# Altium PCB DEV BOARD PCB.PcbDoc
Units mm, origin at the board's own origin, x right, y up, seen from the top; angles counter-clockwise.
Board outline 99 x 99 mm, 2 copper layers (Top Layer, Bottom Layer); 53 components, 85 nets, 292 pads, 52 vias.
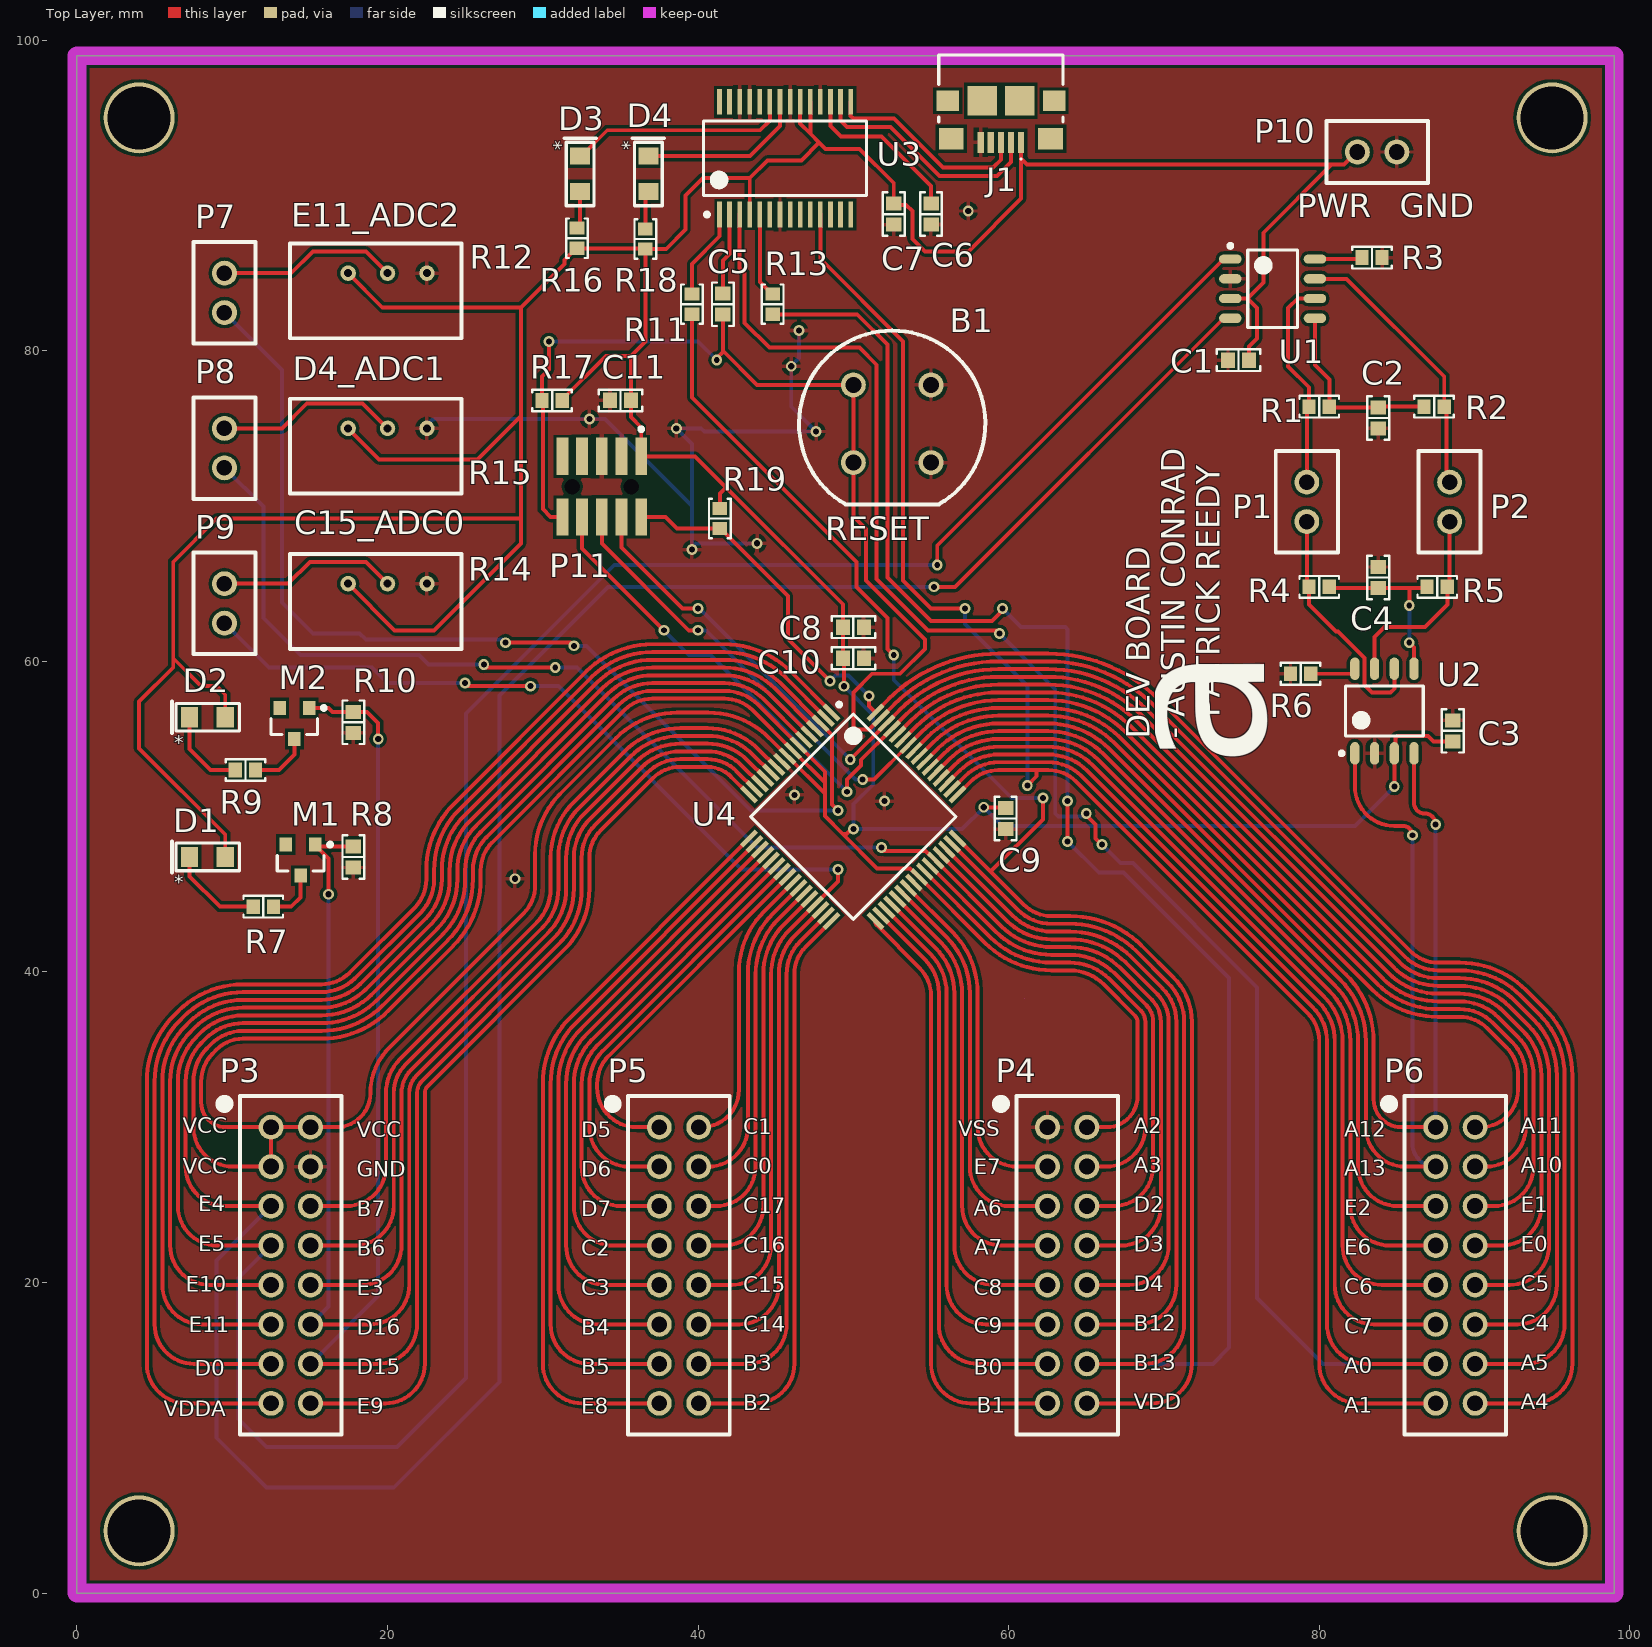
[diagram p0: Top Layer view]
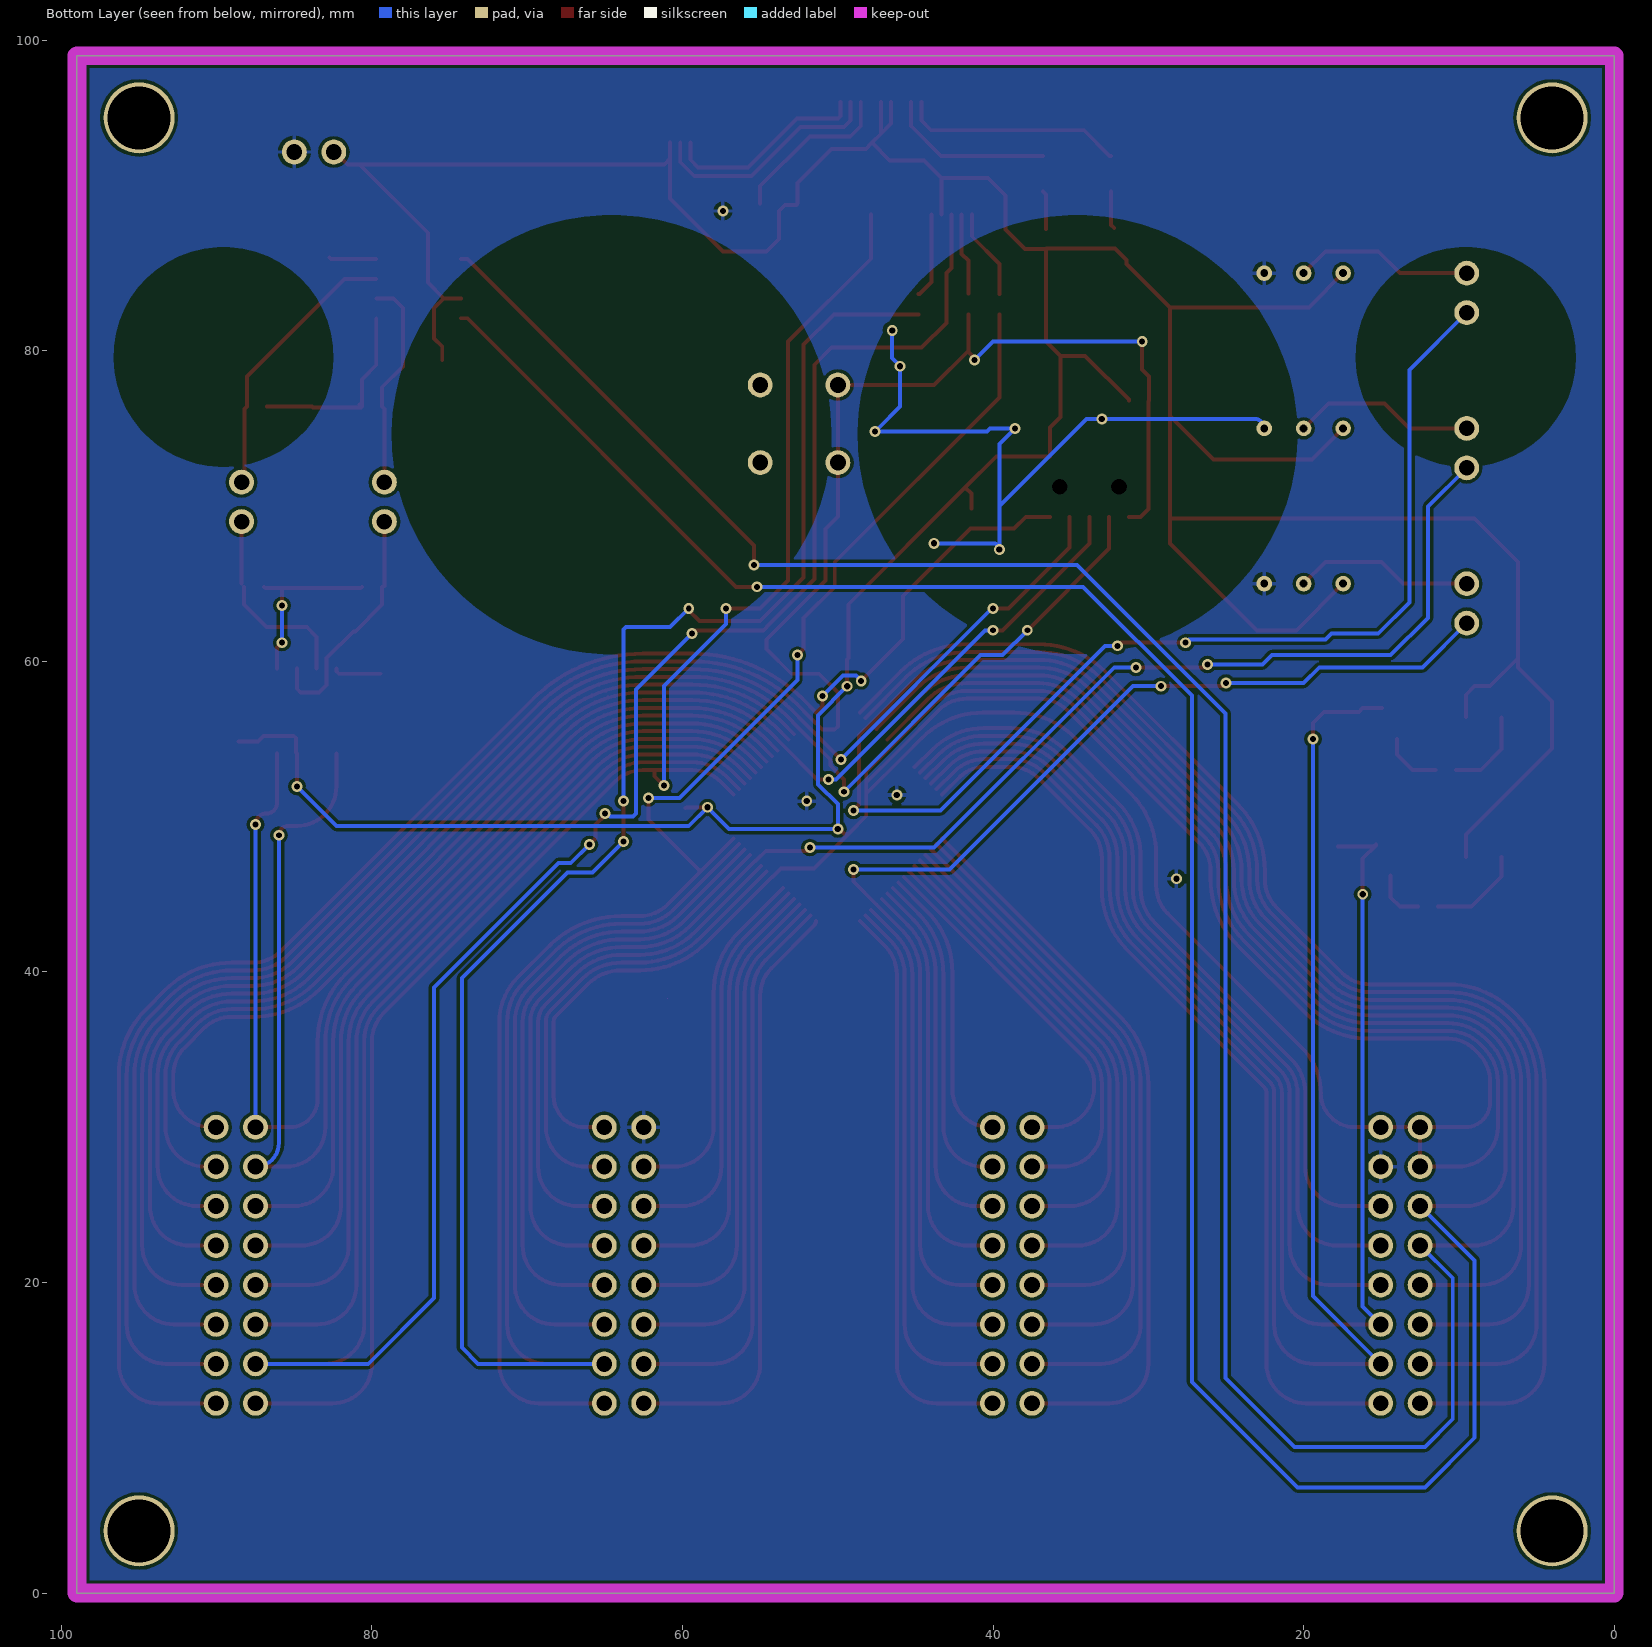
[diagram p1: Bottom Layer view, seen from below]
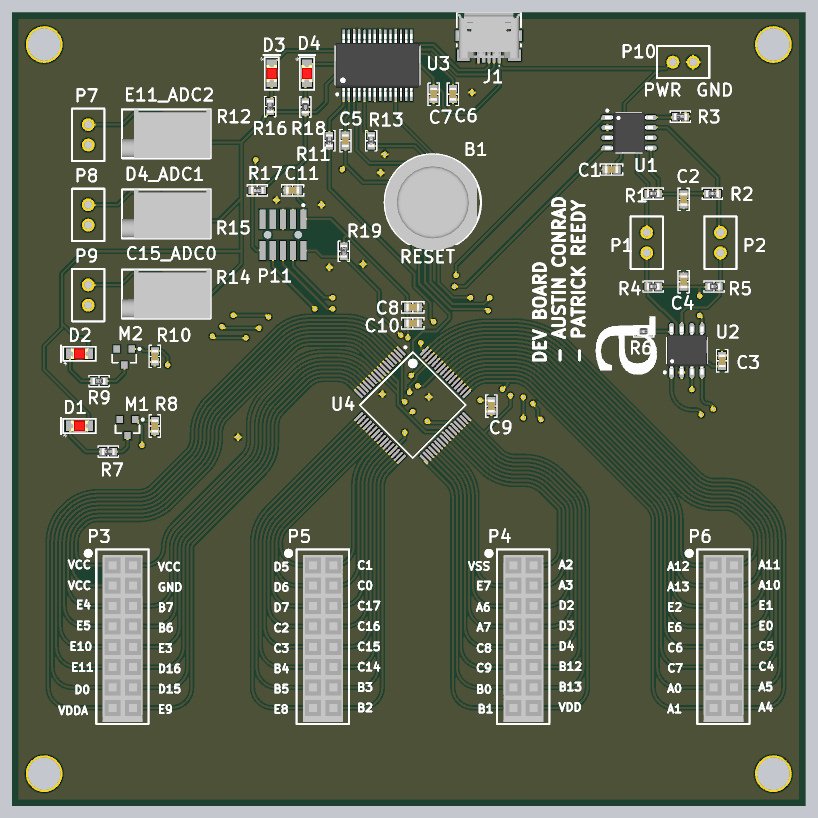
[diagram p2: 3D render of the assembled board from above, using the file's embedded part models]

## Layer stack, top to bottom
Top Solder: solder mask 0.0102, Solder Resist, Dk 3.5
Top Layer: signal copper 0.0356
Dielectric 1: dielectric 0.32, FR-4, Dk 4.8
Bottom Layer: signal copper 0.0356
Bottom Solder: solder mask 0.0102, Solder Resist, Dk 3.5

## Board outline
0,0 0,99 99,99 99,0
cut-out: -11.112,174.467
cut-out: 61,38.309

## Design rules (kind name [scope] priority, off if disabled: settings)
Clearance [All] p1: gap=0.203 ignorepadtopadclearanceinfootprint=FALSE except(0.2: Arc-SMDPad Track-SMDPad SMDPad-SMDPad SMDPad-THPad SMDPad-Via SMDPad-Fill SMDPad-Poly SMDPad-Region SMDPad-Text SMDPad-Hole)
MinimumSolderMaskSliver [All] p1: minsoldermaskwidth=0.2
PolygonConnect [All] p1: connectstyle=Relief reliefconductorwidth=0.254 reliefentries=4 polygonreliefangle="90 Angle" airgapwidth=0.254
RoutingVias [All] p1: holewidth=0.381 width=0.762 viastyle="Through Hole" minholewidth=0.381 minwidth=0.381 maxholewidth=0.762 maxwidth=1.27
SilkToSilkClearance [All] p1: silktosilkclearance=0.05
SilkToSolderMaskClearance [IsPad] p1: minsilkscreentomaskgap=0.05 clearancetoexposedcopper=TRUE
SolderMaskExpansion [All] p1: expansion=0.102
Width [All] p1: maxlimit=1.524 minlimit=0.254 preferedwidth=0.254 minimp=50.000000 maximp=50.000000 favimp=50.000000 checkconnectedcopper=TRUE
27 further rules are at their usual default settings.

## Classes and differential pairs
component class U_MCU_MKE185F512VLH16: B1 C5 C6 C7 C8 C9 C10 C11 D3 D4 J1 P7 P8 P9 P10 P11 R11 R12 R13 R14 R15 R16 R17 R18 R19 U3 U4
component class "U_Header Pinout": P3 P4 P5 P6
component class U_CAN_Tranceiver: C1 C2 C3 C4 P1 P2 R1 R2 R3 R4 R5 R6 U1 U2
component class "DEV Board": D1 D2 M1 M2 R7 R8 R9 R10

## Components (designator, comment, footprint, x,y, rotation, side; value= is the part's Value field where it differs from the comment)
B1 "KS-01Q-01" KS-01Q-01 50,72.8 r0 top value=NULL
C1 "Capacitor MLCC 0.10uf 50V CAP 0603/1608" "CAP 0603/1608" 74.8,79.4 r0 top value=0.10uf
C2 "Capacitor MLCC 4700pf 50V CAP 0603/1608" "CAP 0603/1608" 83.8,75.675 r90 top value=4700pf
C3 "Capacitor MLCC 0.10uf 50V CAP 0603/1608" "CAP 0603/1608" 88.6,55.525 r270 top value=0.10uf
C4 "Capacitor MLCC 4700pf 50V CAP 0603/1608" "CAP 0603/1608" 83.8,65.4 r270 top value=4700pf
C5 "Capacitor MLCC 0.10uf 25V CAP 0603/1608" "CAP 0603/1608" 41.6,83 r270 top value=0.10uf
C6 "Capacitor MLCC 0.10uf 25V CAP 0603/1608" "CAP 0603/1608" 55,88.8 r90 top value=0.10uf
C7 "Capacitor MLCC 0.10uf 25V CAP 0603/1608" "CAP 0603/1608" 52.6,88.8 r90 top value=0.10uf
C8 "Capacitor MLCC 0.10uf 25V CAP 0603/1608" "CAP 0603/1608" 50,62.2 r180 top value=0.10uf
C9 "Capacitor MLCC 100pf 25V CAP 0603/1608" "CAP 0603/1608" 59.8,49.875 r90 top value=100pf
C10 "Capacitor MLCC 0.10uf 25V CAP 0603/1608" "CAP 0603/1608" 50,60.2 r180 top value=0.10uf
C11 "Capacitor MLCC 0.10uf 16V CAP 0603/1608" "CAP 0603/1608" 35,76.8 r0 top value=0.10uf
D1 "LED" 0805_LED 8.4,47.4 r180 top value=Red
D2 "LED" 0805_LED 8.4,56.4 r180 top value=Red
D3 "LED" 0805_LED 32.4,91.4 r90 top value=Green
D4 "LED" 0805_LED 36.8,91.4 r90 top value=Red
J1 "1981568-1" TECO-1981568-5_V 59.5,93.425 r180 top value=CONN
M1 "DMG2302UK-7" SOT23-3 14.4,47.2 r270 top value=N_Channel
M2 "DMG2302UK-7" SOT23-3 14,56 r270 top value=N_Channel
P1 "M20-9990246" M20-9990246 79.2,69 r270 top value=CONN
P2 "M20-9990246" M20-9990246 88.4,69 r270 top value=CONN
P3 "PPTC082LFBN-RC" PPTC082LFBN-RC 12.5,30 r270 top value=CONN
P4 "PPTC082LFBN-RC" PPTC082LFBN-RC 62.5,30 r270 top value=CONN
P5 "PPTC082LFBN-RC" PPTC082LFBN-RC 37.5,30 r270 top value=CONN
P6 "PPTC082LFBN-RC" PPTC082LFBN-RC 87.5,30 r270 top value=CONN
P7 "M20-9990246" M20-9990246 9.5,85 r90 top value=CONN
P8 "M20-9990246" M20-9990246 9.5,75 r90 top value=CONN
P9 "M20-9990246" M20-9990246 9.5,65 r90 top value=CONN
P10 "M20-9990246" M20-9990246 85,92.8 r0 top value=CONN
P11 "5103309-1" HDR2X5_SMT 33.8,71.25 r180 top value=CONN
R1 "Resistor 62 0603 1/10W 5%" "RES 0603/1608" 80,76.4 r0 top value=62
R2 "Resistor 62 0603 1/10W 5%" "RES 0603/1608" 87.4,76.4 r0 top value=62
R3 "Resistor 100 0603 1/10W 10%" "RES 0603/1608" 83.4,86 r180 top value=100
R4 "Resistor 62 0603 1/10W 5%" "RES 0603/1608" 80,64.8 r0 top value=62
R5 "Resistor 62 0603 1/10W 5%" "RES 0603/1608" 87.6,64.8 r0 top value=62
R6 "Resistor 100 0603 1/10W 10%" "RES 0603/1608" 78.8,59.2 r0 top value=100
R7 "1" "RES 0603/1608" 12,44.2 r180 top
R8 "resistor" 0603 17.8,47.4 r90 top
R9 "1" "RES 0603/1608" 10.85,53 r180 top
R10 "resistor" 0603 17.8,56.075 r90 top
R11 "1k" "RES 0603/1608" 39.6,83 r270 top
R12 "3299X-1-502LF" 3299X-1-502LF 20,85 r270 top value=5K
R13 "1k" "RES 0603/1608" 44.8,83 r270 top
R14 "3299X-1-502LF" 3299X-1-502LF 20,65 r270 top value=5K
R15 "3299X-1-502LF" 3299X-1-502LF 20,75 r270 top value=5K
R16 "1k" "RES 0603/1608" 32.2,87.25 r270 top
R17 "Resistor 10k 0603 1/10W 5%" "RES 0603/1608" 30.6,76.8 r0 top value=10k
R18 "1k" "RES 0603/1608" 36.6,87.2 r270 top
R19 "Resistor 10k 0603 1/10W 1%" "RES 0603/1608" 41.4,69.2 r90 top value=10k
U1 "MCP2561 CAN Transceiver" SOIC-8 77,84 r0 top value=CAN/UART
U2 "MCP2561 CAN Transceiver" SOIC-8 84.2,56.8 r90 top value=CAN/UART
U3 "FT232RL" SSOP-28 45.6,92.4 r90 top
U4 "MKE18F512 VLH16 MCU" TQFP64 50,50 r315 top

## Footprints (in the part's own frame and the unit in brackets; to place one, negate y for a bottom-side part, rotate by r counter-clockwise, add the part's x,y. Pads: shape width x height; smd on the part's side, far side on the other; paste and mask are expansions set on the pad)
0603 [mm]
  rect 0.9x1 smd: 1(-0.675,0) 2(0.675,0)
  silkscreen extent -1.4,-0.7 1.4,0.7, body extent -0.8,-0.41 0.8,0.41, height 0.82
0805_LED [mm]
  rect 1.1x1.3 smd: 1(-1.15,0) 2(1.15,0)
  silkscreen extent -2.06,-1.02 2.29,1.02, body extent -1.05,-0.67 1.05,0.68, height 0.9
3299X-1-502LF [mm]
  round 1 hole 0.51: 1(0,-2.54) 2(0,0) 3(0,2.54)
  silkscreen extent -1.91,-6.29 4.19,4.76, body extent -1.91,-6.29 4.19,4.76, height 10.05
"CAP 0603/1608" [mm] "Chip Capacitor, 2-Leads, Body 1.60x0.80mm, IPC Medium Density"
  rect 0.9x1 smd: 1(-0.675,0) 2(0.675,0)
  silkscreen extent -1.4,-0.7 1.4,0.7, body extent -0.8,-0.41 0.8,0.41, height 0.82
HDR2X5_SMT [mm] "Header, 10-Leads, Body 3.43x6.35mm, Pitch 1.27mm"
  rect 0.76x2.4 smd: 1(-2.54,-1.95) 2(-2.54,1.95) 3(-1.27,-1.95) 4(-1.27,1.95) 5(0,-1.95) 6(0,1.95) 7(1.27,-1.95) 8(1.27,1.95) 9(2.54,-1.95) 10(2.54,1.95)
  round 0 hole 1 unplated: MH1(-1.905,0) MH2(1.905,0)
  silkscreen extent -2.67,-3.82 -2.42,-3.58, body extent -3.18,-1.72 3.18,1.72, height 4.55
KS-01Q-01 [mm]
  round 1.6 hole 1.02: 1(0,0) 2(5,0) 3(0,5) 4(5,5)
  silkscreen extent -3.5,-2.7 8.5,8.5, body extent -3.5,-3.5 8,8.5, height 14.36
M20-9990246 [mm]
  round 1.6 hole 1: 1(-2.54,0) 2(0,0)
  silkscreen extent -4.54,-2 2,2
PPTC082LFBN-RC [mm] "2x8 header female"
  round 1.6 hole 1.02: 1(0,0) 2(2.54,0) 3(5.08,0) 4(7.62,0) 5(10.16,0) 6(12.7,0) 7(15.24,0) 8(17.78,0) 9(17.78,2.54) 10(15.24,2.54) 11(12.7,2.54) 12(10.16,2.54) 13(7.62,2.54) 14(5.08,2.54) 15(2.54,2.54) 16(0,2.54)
  silkscreen extent -2,-3.07 19.78,4.54, body extent -1.3,-1.2 19.52,3.8, height 8.5
"RES 0603/1608" [mm] "Chip Resistor, 2-Leads, Body 1.60x0.80mm, IPC Medium Density"
  rect 0.85x0.95 smd: 1(-0.65,0) 2(0.65,0)
  silkscreen extent -1.27,-0.7 1.27,0.7, body extent -0.8,-0.4 0.8,0.4, height 0.45
SOIC-8 [mm] "SOIC, 8-Leads, Body 4.90x3.90mm, Pitch 1.27mm, IPC Medium Density"
  oval 1.45x0.6 smd: 1(-2.725,1.905) 2(-2.725,0.635) 3(-2.725,-0.635) 4(-2.725,-1.905) 5(2.725,-1.905) 6(2.725,-0.635) 7(2.725,0.635) 8(2.725,1.905)
  silkscreen extent -2.85,-2.5 1.6,2.88, body extent -3,-2.5 3,2.5, height 1.75
SOT23-3 [mm] "SOT23, 3-Leads, Body 2.92x2.37mm, Pitch 0.95mm, IPC Medium Density, NUP2105L"
  rect 0.9x0.8 smd: 1(-1,0.95) 2(-1,-0.95) 3(1,0)
  silkscreen extent -1.12,-1.5 0.7,2.03, body extent -0.7,-1.52 0.7,1.52, height 1.11
SSOP-28 [mm] "hi"
  rect 1.65x0.3 smd: 1(-3.625,4.225) 2(-3.625,3.575) 3(-3.625,2.925) 4(-3.625,2.275) 5(-3.625,1.625) 6(-3.625,0.975) 7(-3.625,0.325) 8(-3.625,-0.325) 9(-3.625,-0.975) 10(-3.625,-1.625) 11(-3.625,-2.275) 12(-3.625,-2.925) 13(-3.625,-3.575) 14(-3.625,-4.225) 15(3.625,-4.225) 16(3.625,-3.575) 17(3.625,-2.925) 18(3.625,-2.275) 19(3.625,-1.625) 20(3.625,-0.975) 21(3.625,-0.325) 22(3.625,0.325) 23(3.625,0.975) 24(3.625,1.625) 25(3.625,2.275) 26(3.625,2.925) 27(3.625,3.575) 28(3.625,4.225)
  silkscreen extent -3.75,-5.25 2.4,5.25, body extent -3.9,-5.25 3.9,5.25, height 2
TECO-1981568-5_V [mm] "SMD, 5-Leads, Body 8x5.9mm, Pitch 0.65mm"
  rect 0.4x1.35 smd: 1(-1.3,0) 2(-0.65,0) 3(0,0) 4(0.65,0) 5(1.3,0)
  rect 1.6x1.4 smd: 6(-3.2,-0.225) 7(3.2,-0.225)
  rect 1.45x1.3 smd: 8(-3.425,-2.675) 9(3.425,-2.675)
  rect 1.9x1.9 smd: 10(-1.2,-2.675) 11(1.2,-2.675)
  silkscreen extent -4,-5.63 4,1.12, body extent -4,-5.5 4,0.1, height 2.79
TQFP64 [mm] "TSQFP, 64-Leads, Body 10.00x10.00mm, Pitch 0.50mm, IPC Medium Density, MKE18F512VLH16"
  rect 1.35x0.3 smd: 1(-5.75,3.75) 2(-5.75,3.25) 3(-5.75,2.75) 4(-5.75,2.25) 5(-5.75,1.75) 6(-5.75,1.25) 7(-5.75,0.75) 8(-5.75,0.25) 9(-5.75,-0.25) 10(-5.75,-0.75) 11(-5.75,-1.25) 12(-5.75,-1.75) 13(-5.75,-2.25) 14(-5.75,-2.75) 15(-5.75,-3.25) 16(-5.75,-3.75) 33(5.75,-3.75) 34(5.75,-3.25) 35(5.75,-2.75) 36(5.75,-2.25) 37(5.75,-1.75) 38(5.75,-1.25) 39(5.75,-0.75) 40(5.75,-0.25) 41(5.75,0.25) 42(5.75,0.75) 43(5.75,1.25) 44(5.75,1.75) 45(5.75,2.25) 46(5.75,2.75) 47(5.75,3.25) 48(5.75,3.75)
  rect 0.3x1.35 smd: 17(-3.75,-5.75) 18(-3.25,-5.75) 19(-2.75,-5.75) 20(-2.25,-5.75) 21(-1.75,-5.75) 22(-1.25,-5.75) 23(-0.75,-5.75) 24(-0.25,-5.75) 25(0.25,-5.75) 26(0.75,-5.75) 27(1.25,-5.75) 28(1.75,-5.75) 29(2.25,-5.75) 30(2.75,-5.75) 31(3.25,-5.75) 32(3.75,-5.75) 49(3.75,5.75) 50(3.25,5.75) 51(2.75,5.75) 52(2.25,5.75) 53(1.75,5.75) 54(1.25,5.75) 55(0.75,5.75) 56(0.25,5.75) 57(-0.25,5.75) 58(-0.75,5.75) 59(-1.25,5.75) 60(-1.75,5.75) 61(-2.25,5.75) 62(-2.75,5.75) 63(-3.25,5.75) 64(-3.75,5.75)
  silkscreen extent -5.87,-4.67 4.68,4.68, body extent -5,-5 5,5, height 1.6

## Part data
B1: library part 7, "RESET button", Manufacturer_id=1, Package=NULL, Supplier1PartNo=EG4791-ND, Voltage_Rating=Null, ComponentLink1Description=null, ComponentLink1URL=Null, Created_By=Austin, Created_Date=12/15/2018, Drawer_id=1, idTable=7, Link=https://www.digikey.com/product-detail/en/e-switch/KS-01Q-01/EG4791-ND/2116270, MfrPartNo=KS-01Q-01, Name=KS-01Q-01, Num_Contacts=4, Num_Rows=2, Pitch=5, Supplier1=e-switch, Updated_By=Null
C1 C3: library part 943, Dielectric=Ceramic, Manufacturer_id=1, Package="CAP 0603/1608", Voltage_Rating=50V, Created_By="Nick Mah", Created_Date=10/20/2018, Drawer_id=1, idCapacitor=943, Name="Cap_0.10uf_50V_CAP 0603/1608"
C2 C4: library part 929, Dielectric=Ceramic, Manufacturer_id=1, Package="CAP 0603/1608", Voltage_Rating=50V, Created_By="Nick Mah", Created_Date=10/20/2018, Drawer_id=1, idCapacitor=929, Name="Cap_4700pf_50V_CAP 0603/1608"
C5 C6 C7 C8 C10: library part 583, Dielectric=Ceramic, Manufacturer_id=1, Package="CAP 0603/1608", Voltage_Rating=25V, Created_By="Nick Mah", Created_Date=10/20/2018, Drawer_id=1, idCapacitor=583, Name="Cap_0.10uf_25V_CAP 0603/1608"
C9: library part 529, Dielectric=Ceramic, Manufacturer_id=1, Package="CAP 0603/1608", Voltage_Rating=25V, Created_By="Nick Mah", Created_Date=10/20/2018, Drawer_id=1, idCapacitor=529, Name="Cap_100pf_25V_CAP 0603/1608"
C11: library part 223, Dielectric=Ceramic, Manufacturer_id=1, Package="CAP 0603/1608", Voltage_Rating=16V, Created_By="Nick Mah", Created_Date=10/20/2018, Drawer_id=1, idCapacitor=223, Name="Cap_0.10uf_16V_CAP 0603/1608"
D1 D2 D4: library part 1, Package=0805, Drawer_id=1, idLED=1, Manufacturer_id=1, Name=LED_0805_RED, Vf=0.7V
D3: library part 2, Manufacturer_id=1, Package=0805, Brightness=7mcd, Drawer_id=1, Id=20mA, idLED=2, Link=https://www.digikey.com/product-detail/en/visual-communications-company-vcc/CMD17-21VGD-TR8/L62505CT-ND/254936, Name=CMD17_0805_GREEN, Vf=2.1V
J1: library part 5, "USB Micro Type B", Manufacturer_id=1, ComponentLink1Description=Datasheet, Created_By=Aiku, Created_Date=10/20/2018, Drawer_id=1, idConn=5, Link=https://www.mouser.com/ProductDetail/TE-Connectivity-AMP/1981568-1?qs=sGAEpiMZZMulM8LPOQ%252bykzEIUPbUCiSfqsfxH3Oq%252bYo%3d, MfrPartNo=1981568-1, Name="TE USB Micro", Num_Contacts=5, Supplier1=TE
M1 M2: library part 6, "MOSFET N-CHANNEL 30V 5A SOT23", Manufacturer_id=1, Package=SOT-23, Created_By=Angel, Drawer_id=1, Id=2.8A, idFETs=6, Link=https://www.digikey.com/product-detail/en/diodes-incorporated/DMG2302UK-7/DMG2302UK-7DICT-ND/6010163, MfrPartNo=DMG2302UK-7, Name=DMG2302UK-7, Num_Circuits=1, Rds_On=90mOhm, Supplier1=Digi-Key, Vdss=20V, Vgs(Max)=1V, Vgs(typ)=800mV
P1 P2 P7 P8 P9 P10: library part 25, "2 Pin VCC Power Header, Male", Manufacturer_id=1, Package=Conn, Supplier1PartNo=952-2262-ND, Voltage_Rating=Null, ComponentLink1Description=Null, ComponentLink1URL=https://www.digikey.com/product-detail/en/harwin-inc/M20-9990246/952-2262-ND/3728226, Created_By=Austin, Created_Date=12/15/2018, Drawer_id=1, idConn=25, Link=https://www.digikey.com/product-detail/en/harwin-inc/M20-9990246/952-2262-ND/3728226, MfrPartNo=M20-9990246, Name=M20-9990246, Num_Contacts=2, Num_Rows=Null, Pitch=2.54, Supplier1=Digi-Key, Updated_By=Null
P3 P4 P5 P6: library part 23, "2x8 female header", Manufacturer_id=1, Package=Conn, Supplier1PartNo=S7076-ND, Voltage_Rating=V, ComponentLink1Description=Null, ComponentLink1URL=Null, Created_By=Austin, Created_Date=12/15/2018, Drawer_id=1, idConn=23, Link=https://www.digikey.com/product-detail/en/sullins-connector-solutions/PPTC082LFBN-RC/S7076-ND/810214, MfrPartNo=PPTC082LFBN-RC, Name=PPTC082LFBN-RC, Num_Contacts=16, Num_Rows=2, Pitch=2.54, Supplier1=Digi-Key, Updated_By=Null
P11: library part 4, "2 row connector", Manufacturer_id=1, Voltage_Rating=None, ComponentLink1Description=Datasheet, Created_By=Aiku, Drawer_id=1, idConn=4, Link=https://www.digikey.com/product-detail/en/5103309-1/A33160-ND/1114898?utm_campaign=buynow&WT.z_cid=ref_octopart_dkc_buynow&utm_medium=aggregator&curr=usd&site=us&utm_source=octopart, MfrPartNo=5103309-1, Name=CONN_TE_2X5POS, Num_Contacts=10, Num_Rows=2, Pitch=2.54mm
R1 R2 R4 R5: library part 1340, Manufacturer_id=1, Package=0603, Power=1/10W, Tolerance=5%, ComponentLink1Description=Datasheet, Created_By="Nick Mah", Created_Date=2018-10-20, Drawer_id=1, idResistor=1340, Name=Res_62_0603_1/10W_5%, Supplier 1=Digi-Key
R3 R6: library part 2293, Manufacturer_id=1, Package=0603, Power=1/10W, Tolerance=10%, ComponentLink1Description=Datasheet, Created_By="Nick Mah", Created_Date=2018-10-20, Drawer_id=1, idResistor=2293, Name=Res_100_0603_1/10W_10%, Supplier 1=Digi-Key
R7 R9: Package=0603, percent tolerance=5, Id=1, Name="0603 Resistor", quantity=0, resistance=1
R8 R10 R11 R13 R16 R18: library part 1, Package=0603, percent tolerance=5, Id=1, Name="0603 Resistor", quantity=0
  R8 R10: resistance=1
  R11 R13 R16 R18: resistance=1k
R12 R14 R15: library part 6, Manufacturer_id=1, ComponentLink1Description=Datasheet, Drawer_id=1, idTable=6, Link=https://www.digikey.com/product-detail/en/bourns-inc/3299X-1-502LF/3299X-502LF-ND/1088167, MfrPartNo=3299X-1-502LF, Name=3299X-1-502LF, Num_Contacts=3, Pitch=2.54mm
R17: library part 1393, Manufacturer_id=1, Package=0603, Power=1/10W, Tolerance=5%, ComponentLink1Description=Datasheet, Created_By="Nick Mah", Created_Date=2018-10-20, Drawer_id=1, idResistor=1393, Name=Res_10k_0603_1/10W_5%, Supplier 1=Digi-Key
R19: library part 313, Manufacturer_id=1, Package=0603, Power=1/10W, Tolerance=1%, ComponentLink1Description=Datasheet, Created_By="Nick Mah", Created_Date=2018-10-20, Drawer_id=1, idResistor=313, Name=Res_10k_0603_1/10W_1%, Supplier 1=Digi-Key
U1 U2: library part 5, Manufacturer_id=1, MfrPartNo=MCP2561, Package=SOIC-8, Created_By="Angel Delgado", Data_Rate=1Mbps, Drawer_id=1, idIC_Interface=5, Link=https://www.digikey.com/product-detail/en/microchip-technology/MCP2561T-E-SN/MCP2561T-E-SNCT-ND/5148846, Name="CAN Transceiver", Num_Circuits=1, Protocol=CAN, Type=Transceiver, Vin(Max)=5.5V, Vin(Min)=4.5V
U3: library part 3, Manufacturer_id=1, Created_By=Kyle, Drawer_id=1, idIC_Interface=3, Link=https://www.digikey.com/product-detail/en/ftdi-future-technology-devices-international-ltd/FT232RL-REEL/768-1007-1-ND/1836402, MfrPartNo=FT232RL, Name="USB FTDI", Protocol=UART, Vin(Max)=5.25, Vin(Min)=3.3
U4: library part 1, Drawer_id=1, idMCU=1, Manufacturer_id=1, Name="MKE18F512VLH16 MCU"

## Free pads (board coordinates)
  round 4.572 hole 4.064: 5(4,95) 6(95,95) 7(95,4) 8(4,4)

## Via types
v1: diameter 0.7, hole 0.381, Top Layer to Bottom Layer, 36 vias
v2: diameter 0.7, hole 0.4, Top Layer to Bottom Layer, 16 vias

## Nets (pads, with @x,y where several pads share a name; then routed paths per layer and width w, separated by ;. In a path a pad name is that pad's centre, name@x,y a point inside that pad or via, vN(x,y) a via of type N, cw(c..) or ccw(c..) an arc to the next point about the centre after c; other vN are vias at no path point)
A0_UART0_CTS: P6.7 U3.3 U4.50 | length 163.9
  Top Layer w0.254: U3.3 42.675,85.325 43,85 43,81.8 44.6,80.2 50.4,80.2 51.5,79.1 51.5,65.3 54.4,62.4 54.8,62 59.2,62 v1(59.4,61.8) ; U4.50 57.206,52.61 cw(c59.355,50.46) 59.355,53.5 62.548,53.5 cw(c62.548,50.46) 64.698,52.61 79.61,37.698 cw(c77.46,35.548) 80.5,35.548 80.5,17.3 ccw(c83.04,17.3) 83.04,14.76 P6.7 ; v1(65,50.2) 65,50.079 65.6,49.479 65.6,48.6 v1(66,48.2)
  Bottom Layer w0.254: v1(59.4,61.8) 63,58.2 63,50.2 63.2,50 64.679,50 64.879,50.2 v1(65,50.2) ; v1(66,48.2) 67.2,47 68,47 76,39 76,19 80.24,14.76 P6.7
A1_UART0_RTS: P6.8 U3.11 U4.49 | length 106
  Top Layer w0.254: U3.11 47.875,85.925 53.2,80.6 53.2,65.2 54.2,64.2 55,63.4 v1(57.2,63.4) ; U4.49 57.559,52.256 cw(c59.355,50.46) 59.355,53 61.8,53 ; v1(61.2,52) 61.8,52.6 61.8,53 ; P6.8 82.54,12.22 cw(c82.54,14.76) 80,14.76 80,35.548 ccw(c77.46,35.548) 79.256,37.344 64.344,52.256 ccw(c62.548,50.46) 62.548,53 61.8,53
  Bottom Layer w0.254: v1(57.2,63.4) 57.2,62.4 61.2,58.4 v1(61.2,52)
A2_UART0_RX: P4.9 R11.2 U4.48 | length 98.4
  Top Layer w0.254: R11.2 39.6,77 50.2,66.4 50.2,64.8 52.2,62.8 52.2,60.8 v1(52.6,60.4) ; U4.48 58.838,46.465 ; v1(62.2,51.2) 62.2,49.826 58.838,46.465 ; P4.9 69.26,12.22 ccw(c69.26,14.76) 71.8,14.76 71.8,36.8 ccw(c67.8,36.8) 70.628,39.628 68.572,41.685 ccw(c63.948,37.06) 63.948,43.6 62.755,43.6 cw(c62.755,46.14) 60.959,44.344 58.838,46.465
  Bottom Layer w0.254: v1(52.6,60.4) 52.6,58.8 60.2,51.2 v1(62.2,51.2)
A3_UART0_TX: P4.10 R13.2 U4.47 | length 145.2
  Top Layer w0.254: R13.2 50.25,82.35 52.2,80.4 52.2,65.4 55,62.6 58.921,62.6 59.6,63.279 v1(59.6,63.4) ; U4.47 60.606,43.99 ccw(c62.755,46.14) 62.755,43.1 63.948,43.1 cw(c63.948,37.06) 68.219,41.331 70.275,39.275 cw(c67.8,36.8) 71.3,36.8 71.3,17.3 cw(c68.76,17.3) 68.76,14.76 P4.10 ; v1(63.8,48.4) v1(63.8,51)
  Bottom Layer w0.254: v1(59.6,63.4) 60.8,62.2 63.651,62.2 63.8,62.051 v1(63.8,51) ; v1(63.8,48.4) 65.8,46.4 67.4,46.4 74.2,39.6 74.2,15.8 73.16,14.76 P4.10
A4: P6.9 P11.2 R19.1 U4.64 | length 106.5
  Top Layer w0.254: P11.2 37.9,69.3 38.65,68.55 R19.1 41.45,68.55 45.8,64.2 45.8,61.432 v1(48.497,58.735) ; v1(51,57.762) 51,57.132 U4.64 52.256,57.559 cw(c59.356,50.46) 59.356,60.5 62.548,60.5 cw(c62.548,50.46) 69.647,57.559 85.863,41.344 ccw(c87.659,43.14) 87.659,40.6 89.048,40.6 cw(c89.048,34.56) 93.319,38.831 94.531,37.619 cw(c90.26,33.348) 96.3,33.348 96.3,14.76 cw(c93.76,14.76) 93.76,12.22 P6.9
  Bottom Layer w0.254: v1(48.497,58.735) 48.842,59.08 49.682,59.08 v1(51,57.762)
A5: B1.1 B1.3 C5.2 P6.10 P11.10 R17.1 U4.63 | length 145
  Top Layer w0.254: v1(30.4,80.6) 30.4,78.8 29.95,78.35 R17.1 30,76.75 30,69.799 30.499,69.3 P11.10 ; v1(41.2,79.4) 41.2,79.521 41.6,79.921 41.6,80 ; C5.2 41.6,80 ; P6.10 93.26,14.76 ccw(c93.26,17.3) 95.8,17.3 95.8,33.348 ccw(c90.26,33.348) 94.177,37.265 92.965,38.477 ccw(c89.048,34.56) 89.048,40.1 87.659,40.1 cw(c87.659,43.14) 85.509,40.99 69.294,57.206 ccw(c62.548,50.46) 62.548,60 59.356,60 ccw(c59.356,50.46) 52.61,57.206 U4.63 51.004,55.6 50.198,55.6 50,55.798 50,58 51.2,59.2 53,59.2 54.6,60.8 54.6,61.4 50.8,65.2 50.8,68.518 50,69.318 B1.1 B1.3 43.8,77.8 41.6,80
  Bottom Layer w0.254: v1(30.4,80.6) 40,80.6 v1(41.2,79.4)
A6_UART1_CTS: P4.3 U4.38 | length 25.6
  Top Layer w0.254: U4.38 56.024,42.208 cw(c52.46,38.645) 57.5,38.645 57.5,27.46 ccw(c60.04,27.46) 60.04,24.92 P4.3
A7_UART1_RTS: P4.4 U4.37 | length 28.3
  Top Layer w0.254: U4.37 55.67,41.855 cw(c52.46,38.645) 57,38.645 57,24.92 ccw(c59.54,24.92) 59.54,22.38 P4.4
A10: P6.15 P11.6 U4.58 | length 87.3
  Top Layer w0.254: P11.6 33.8,67.6 39.4,62 v1(40,62) ; v1(50.6,52.4) 51.339,52.4 U4.58 54.377,55.438 cw(c59.355,50.46) 59.355,57.5 62.548,57.5 cw(c62.548,50.46) 67.526,55.438 83.741,39.223 ccw(c87.659,43.14) 87.659,37.6 89.048,37.6 cw(c89.048,34.56) 91.198,36.71 92.41,35.498 cw(c90.26,33.348) 93.3,33.348 93.3,30 cw(c90.76,30) 90.76,27.46 P6.15
  Bottom Layer w0.254: v1(40,62) 40.527,62 50.127,52.4 v1(50.6,52.4)
A11: P6.16 U4.57 | length 54.5
  Top Layer w0.254: U4.57 54.731,55.084 cw(c59.355,50.46) 59.355,57 62.548,57 cw(c62.548,50.46) 67.172,55.084 83.388,38.869 ccw(c87.659,43.14) 87.659,37.1 89.048,37.1 cw(c89.048,34.56) 90.844,36.356 92.056,35.144 cw(c90.26,33.348) 92.8,33.348 92.8,32.4 cw(c90.4,32.4) 90.4,30 P6.16
A12_CAN1_RX: P6.1 U2.4 U4.56 | length 73.3
  Top Layer w0.254: U4.56 55.084,54.731 cw(c59.355,50.46) 59.355,56.5 62.548,56.5 cw(c62.548,50.46) 66.819,54.731 81.731,39.819 cw(c77.46,35.548) 83.5,35.548 83.5,31.8 ccw(c85.3,31.8) 85.3,30 P6.1 ; U2.4 86.105,50.895 ccw(c86.8,50.895) 86.8,50.2 cw(c86.8,49.5) v1(87.5,49.5)
  Bottom Layer w0.254: P6.1 v1(87.5,49.5)
A13_CAN1_TX: P6.2 U2.1 U4.55 | length 79.9
  Top Layer w0.254: U4.55 55.438,54.377 cw(c59.355,50.46) 59.355,56 62.548,56 cw(c62.548,50.46) 66.465,54.377 81.377,39.465 cw(c77.46,35.548) 83,35.548 83,30 ccw(c85.54,30) 85.54,27.46 P6.2 ; U2.1 82.295,51.94 ccw(c84.835,51.94) 84.835,49.4 85.4,49.4 cw(c85.4,48.8) v1(86,48.8)
  Bottom Layer w0.254: v1(86,48.8) 86,28.96 ccw(c87.5,28.96) P6.2
B0_SPI0_PCS0: P4.7 U4.34 | length 36.2
  Top Layer w0.254: U4.34 54.61,40.794 cw(c52.46,38.645) 55.5,38.645 55.5,17.3 ccw(c58.04,17.3) 58.04,14.76 P4.7
B1_SPI0_SOUT: P4.8 U4.33 | length 38.8
  Top Layer w0.254: U4.33 ccw(c51.848,43.282) 51.541,42.976 54.256,40.261 cw(c52.46,38.465) 55,38.465 55,14.76 ccw(c57.54,14.76) 57.54,12.22 P4.8
B2_SPI0_SCK: P5.9 U4.32 | length 37
  Top Layer w0.254: P5.9 43.66,12.22 ccw(c43.66,14.76) 46.2,14.76 46.2,39.845 cw(c48.74,39.845) 46.944,41.641 U4.32
B3_SPI0_SIN: P5.10 U4.31 | length 36.8
  Top Layer w0.254: P5.10 43.16,14.76 ccw(c43.16,17.3) 45.7,17.3 45.7,39.845 ; U4.31 46.59,41.994 ; 45.7,39.845 cw(c48.74,39.845) 46.59,41.994 ; 45.7,39.845 cw(c48.74,39.845) 46.59,41.994
B4_SPI0_SOUT: P5.6 U4.19 | length 41.2
  Top Layer w0.254: P5.6 33.54,17.3 cw(c33.54,19.84) 31,19.84 31,32.8 cw(c36.044,32.8) 32.477,36.366 U4.19
B5_SPI0_PCS1: P5.7 U4.18 | length 44.6
  Top Layer w0.254: P5.7 33.04,14.76 cw(c33.04,17.3) 30.5,17.3 30.5,32.8 cw(c36.044,32.8) 32.124,36.72 U4.18
B6_I2C0_SDA: P3.13 U4.12 | length 51.8
  Top Layer w0.254: P3.13 17.86,22.38 ccw(c17.86,24.92) 20.4,24.92 20.4,32.2 cw(c23.004,32.2) 21.163,34.041 29.963,42.842 ccw(c27.46,45.345) 31,45.345 31,47.348 cw(c35.54,47.348) 32.33,50.558 35.642,53.87 cw(c38.852,50.66) 38.852,55.2 40.6,55.2 cw(c40.6,51.035) 43.545,53.98 U4.12
B7_I2C0_SCL: P3.14 U4.11 | length 50
  Top Layer w0.254: P3.14 17.36,24.92 ccw(c17.36,27.46) 19.9,27.46 19.9,32.2 cw(c23.004,32.2) 20.809,34.395 29.61,43.195 ccw(c27.46,45.345) 30.5,45.345 30.5,47.348 cw(c35.54,47.348) 31.976,50.912 35.288,54.224 cw(c38.852,50.66) 38.852,55.7 40.6,55.7 cw(c40.6,51.035) 43.898,54.334 U4.11
B12_ADC1_7: P4.14 U4.43 | length 33.5
  Top Layer w0.254: U4.43 59.192,42.576 ccw(c62.755,46.14) 62.755,41.1 63.948,41.1 cw(c63.948,37.06) 66.805,39.917 68.861,37.861 cw(c67.8,36.8) 69.3,36.8 69.3,27.46 cw(c66.76,27.46) 66.76,24.92 P4.14
B13_ADC1_8: P4.15 U4.42 | length 30
  Top Layer w0.254: U4.42 58.838,42.223 ccw(c62.755,46.14) 62.755,40.6 63.948,40.6 cw(c63.948,37.06) 66.451,39.563 68.507,37.507 cw(c67.8,36.8) 68.8,36.8 68.8,30 cw(c66.26,30) 66.26,27.46 P4.15
C0_ADC0_8: P5.15 U4.26 | length 25.5
  Top Layer w0.254: P5.15 40.66,27.46 ccw(c40.66,30) 43.2,30 43.2,39.845 ; U4.26 44.823,43.762 ; 43.2,39.845 cw(c48.74,39.845) 44.823,43.762 ; 43.2,39.845 cw(c48.74,39.845) 44.823,43.762
C1_ADC0_9: P5.16 U4.25 | length 18.5
  Top Layer w0.254: P5.16 40.225,30 ccw(c40.225,32.4) 42.625,32.4 42.625,39.976 cw(c48.165,39.976) 44.247,43.894 U4.25
C2_ADC0_10: P5.4 U4.21 | length 34.3
  Top Layer w0.254: P5.4 34.54,22.38 cw(c34.54,24.92) 32,24.92 32,32.8 cw(c36.044,32.8) 33.184,35.659 U4.21
C3_ADC0_11: P5.5 U4.20 | length 37.7
  Top Layer w0.254: P5.5 34.04,19.84 cw(c34.04,22.38) 31.5,22.38 31.5,32.8 cw(c36.044,32.8) 32.831,36.013 U4.20
C4: P6.11 P11.4 U4.62 | length 101.2
  Top Layer w0.254: P11.4 35.07,67.33 39,63.4 v1(40,63.4) ; v1(49.8,53.689) U4.62 52.963,56.852 cw(c59.356,50.46) 59.356,59.5 62.548,59.5 cw(c62.548,50.46) 68.94,56.852 85.156,40.637 ccw(c87.659,43.14) 87.659,39.6 89.048,39.6 cw(c89.048,34.56) 92.612,38.124 93.824,36.912 cw(c90.26,33.348) 95.3,33.348 95.3,19.84 cw(c92.76,19.84) 92.76,17.3 P6.11
  Bottom Layer w0.254: v1(40,63.4) 40.089,63.4 v1(49.8,53.689)
C5: P6.12 P11.8 U4.61 | length 102.2
  Top Layer w0.254: P11.8 32.53,67.27 v1(37.8,62) ; v1(49.6,51.6) 49.6,52.4 50.48,53.28 50.48,53.662 U4.61 53.317,56.499 cw(c59.356,50.46) 59.356,59 62.548,59 cw(c62.548,50.46) 68.587,56.499 84.802,40.283 ccw(c87.659,43.14) 87.659,39.1 89.048,39.1 cw(c89.048,34.56) 92.258,37.77 93.47,36.558 cw(c90.26,33.348) 94.8,33.348 94.8,22.38 cw(c92.26,22.38) 92.26,19.84 P6.12
  Bottom Layer w0.254: v1(37.8,62) 39.4,60.4 40.8,60.4 v1(49.6,51.6)
C6_UART1_RX: P6.5 U4.52 | length 55.6
  Top Layer w0.254: U4.52 56.499,53.317 cw(c59.355,50.46) 59.355,54.5 62.548,54.5 cw(c62.548,50.46) 65.405,53.317 80.317,38.405 cw(c77.46,35.548) 81.5,35.548 81.5,22.38 ccw(c84.04,22.38) 84.04,19.84 P6.5
C7_UART1_TX: P6.6 U4.51 | length 57.5
  Top Layer w0.254: U4.51 56.852,52.963 cw(c59.355,50.46) 59.355,54 62.548,54 cw(c62.548,50.46) 65.051,52.963 79.963,38.051 cw(c77.46,35.548) 81,35.548 81,19.84 ccw(c83.54,19.84) 83.54,17.3 P6.6
C8_UART1_RX: P4.5 U4.36 | length 30.9
  Top Layer w0.254: U4.36 55.317,41.501 cw(c52.46,38.645) 56.5,38.645 56.5,22.38 ccw(c59.04,22.38) 59.04,19.84 P4.5
C9_UART1_TX: P4.6 U4.35 | length 33.6
  Top Layer w0.254: U4.35 54.963,41.148 cw(c52.46,38.645) 56,38.645 56,19.84 ccw(c58.54,19.84) 58.54,17.3 P4.6
C14_ADC0_12: P5.11 U4.30 | length 34.5
  Top Layer w0.254: P5.11 42.66,17.3 ccw(c42.66,19.84) 45.2,19.84 45.2,39.845 ; U4.30 46.237,42.348 ; 45.2,39.845 cw(c48.74,39.845) 46.237,42.348 ; 45.2,39.845 cw(c48.74,39.845) 46.237,42.348
C15_ADC0_13: P5.12 P9.1 U4.29 | length 78
  Top Layer w0.254: v1(25,58.6) 25.2,58.4 v1(29.2,58.4) ; P5.12 42.16,19.84 ccw(c42.16,22.38) 44.7,22.38 44.7,39.845 cw(c48.74,39.845) 45.883,42.701 U4.29 49,45.818 v1(49,46.6)
  Bottom Layer w0.254: P9.1 12.36,59.6 19,59.6 20,58.6 v1(25,58.6) ; v1(29.2,58.4) 31,58.4 42.8,46.6 v1(49,46.6)
C16: P5.13 U4.28 | length 26.4
  Top Layer w0.254: P5.13 41.66,22.38 ccw(c41.66,24.92) 44.2,24.92 44.2,39.845 cw(c48.74,39.845) 45.53,43.055 U4.28
C17: P5.14 U4.27 | length 27.7
  Top Layer w0.254: P5.14 41.16,24.92 ccw(c41.16,27.46) 43.7,27.46 43.7,39.845 ; U4.27 45.176,43.408 ; 43.7,39.845 cw(c48.74,39.845) 45.176,43.408 ; 43.7,39.845 cw(c48.74,39.845) 45.176,43.408
CAN0_N: P1.1 R1.1 U1.6 | length 13.8
  Top Layer w0.254: P1.1 79.2,76.25 R1.1 79.35,77.65 78,79 78,82.746 78.619,83.365 U1.6
CAN0_P: P2.1 R2.2 U1.7 | length 17.9
  Top Layer w0.254: U1.7 81.765,84.635 88.05,78.35 R2.2 88.2,76.25 88.2,71.74 P2.1
CAN1_N: P1.2 R4.1 U2.6 | length 15.3
  Top Layer w0.254: R4.1@79.2,64.85 P1.2@79.2,68.8 ; R4.1 79.35,63.65 81.07,61.93 81.202,61.93 82.922,60.21 82.922,58.478 83.4,58 84.6,58 84.835,58.235 U2.6
CAN1_P: P2.2 R5.2 U2.7 | length 12.7
  Top Layer w0.254: U2.7 83.565,61.565 84.2,62.2 86.8,62.2 88.25,63.65 R5.2 ; R5.2@88.4,65 P2.2
D0_SPI1_SCK: P3.7 U4.2 | length 83.4
  Top Layer w0.254: P3.7 7.54,14.76 cw(c7.54,17.3) 5,17.3 5,32.948 cw(c10.54,32.948) 6.623,36.865 6.879,37.121 cw(c10.69,33.31) 10.69,38.7 15.748,38.7 ccw(c15.748,41.74) 17.897,39.59 22.11,43.803 ccw(c19.96,45.952) 23,45.952 23,46.548 cw(c28.54,46.548) 24.623,50.465 33.135,58.977 cw(c37.052,55.06) 37.052,60.6 41.702,60.6 cw(c41.702,55.06) 45.619,58.977 U4.2
D1_SPI1_SIN: P3.8 U4.1 | length 87.6
  Top Layer w0.254: P3.8 7.04,12.22 cw(c7.04,14.76) 4.5,14.76 4.5,32.948 cw(c10.54,32.948) 6.269,37.219 6.525,37.475 cw(c10.69,33.31) 10.69,39.2 15.748,39.2 ccw(c15.748,41.74) 17.544,39.944 21.756,44.156 ccw(c19.96,45.952) 22.5,45.952 22.5,46.548 cw(c28.54,46.548) 24.269,50.819 32.781,59.331 cw(c37.052,55.06) 37.052,61.1 41.702,61.1 cw(c41.702,55.06) 45.972,59.331 U4.1
D2_SPI1_SOUT: P4.11 U4.46 | length 43.8
  Top Layer w0.254: U4.46 60.252,43.637 ccw(c62.755,46.14) 62.755,42.6 63.948,42.6 cw(c63.948,37.06) 67.865,40.977 69.921,38.921 cw(c67.8,36.8) 70.8,36.8 70.8,19.84 cw(c68.26,19.84) 68.26,17.3 P4.11
D3_SPI1_PCS0: P4.12 U4.45 | length 40.3
  Top Layer w0.254: U4.45 59.899,43.283 ccw(c62.755,46.14) 62.755,42.1 63.948,42.1 cw(c63.948,37.06) 67.512,40.624 69.568,38.568 cw(c67.8,36.8) 70.3,36.8 70.3,22.38 cw(c67.76,22.38) 67.76,19.84 P4.12
D4_ADC1_6: P4.13 P8.1 U4.44 | length 97.4
  Top Layer w0.254: v1(26.2,59.8) 26.4,59.6 v1(30.8,59.6) ; v1(51.8,48) 51.8,47.949 51.949,47.8 54.642,47.8 55.271,47.172 U4.44 59.545,42.93 ccw(c62.755,46.14) 62.755,41.6 63.948,41.6 cw(c63.948,37.06) 67.158,40.27 69.214,38.214 cw(c67.8,36.8) 69.8,36.8 69.8,24.92 cw(c67.26,24.92) 67.26,22.38 P4.13
  Bottom Layer w0.254: P8.1 12,69.96 12,62.8 14.4,60.4 22.04,60.4 22.64,59.8 v1(26.2,59.8) ; v1(30.8,59.6) 32.2,59.6 43.8,48 v1(51.8,48)
D5: P5.1 U4.24 | length 24
  Top Layer w0.254: P5.1 36.04,30 cw(c36.04,32.54) 33.5,32.54 33.5,32.8 cw(c36.044,32.8) 34.245,34.599 U4.24
D6_UART2_RX: P5.2 U4.23 | length 27.4
  Top Layer w0.254: P5.2 35.54,27.46 cw(c35.54,30) 33,30 33,32.8 cw(c36.044,32.8) 33.891,34.952 U4.23
D7_UART2_TX: P5.3 U4.22 | length 30.9
  Top Layer w0.254: P5.3 35.04,24.92 cw(c35.04,27.46) 32.5,27.46 32.5,32.8 cw(c36.044,32.8) 33.538,35.306 U4.22
D15_LED_R2: M2.1 P3.10 R10.2 U4.15 | length 105.3
  Top Layer w0.254: M2.1 16.2,57 16.45,56.75 R10.2 18.681,56.75 19.4,56.031 v2(19.4,55) ; P3.10 19.36,14.76 ccw(c19.36,17.3) 21.9,17.3 21.9,32.2 cw(c23.004,32.2) 22.223,32.981 31.024,41.781 ccw(c27.46,45.345) 32.5,45.345 32.5,47.348 cw(c35.54,47.348) 33.39,49.498 36.702,52.81 cw(c38.852,50.66) 38.852,53.7 40.6,53.7 cw(c40.6,51.035) 42.484,52.92 U4.15
  Bottom Layer w0.254: P3.10 19.4,19.12 v2(19.4,55)
D16_LED_R1: M1.1 P3.11 R8.2 U4.14 | length 89.8
  Top Layer w0.254: P3.11 18.86,17.3 ccw(c18.86,19.84) 21.4,19.84 21.4,32.2 cw(c23.004,32.2) 21.87,33.334 ; v2(16.2,45) 16.2,47.3 15.35,48.15 M1.1 ccw(c15.652,48.502) 15.652,48.075 R8.2 ; 21.87,33.334 30.67,42.135 ccw(c27.46,45.345) 32,45.345 32,47.348 cw(c35.54,47.348) 33.037,49.851 36.349,53.163 cw(c38.852,50.66) 38.852,54.2 40.6,54.2 cw(c40.6,51.035) 42.838,53.273 U4.14
  Bottom Layer w0.254: P3.11 16.2,18.46 v2(16.2,45)
D_N: J1.2 U3.16 | length 15.3
  Top Layer w0.254: U3.16 49.175,94.819 49.594,94.4 52.4,94.4 55.552,91.248 59.248,91.248 60.15,92.15 J1.2
D_P: J1.3 U3.15 | length 13.3
  Top Layer w0.254: U3.15 49.825,95.124 49.997,94.952 52.629,94.952 55.781,91.8 59,91.8 59.5,92.3 J1.3
E0_I2C1_SDA: P6.13 U4.60 | length 67.1
  Top Layer w0.254: U4.60 53.67,56.145 cw(c59.356,50.46) 59.356,58.5 62.548,58.5 cw(c62.548,50.46) 68.233,56.145 84.448,39.93 ccw(c87.659,43.14) 87.659,38.6 89.048,38.6 cw(c89.048,34.56) 91.905,37.417 93.117,36.205 cw(c90.26,33.348) 94.3,33.348 94.3,24.92 cw(c91.76,24.92) 91.76,22.38 P6.13
E1_I2C1_SCL: P6.14 U4.59 | length 62.9
  Top Layer w0.254: U4.59 54.024,55.792 cw(c59.356,50.46) 59.356,58 62.548,58 cw(c62.548,50.46) 67.88,55.792 84.095,39.576 ccw(c87.659,43.14) 87.659,38.1 89.048,38.1 cw(c89.048,34.56) 91.551,37.063 92.763,35.851 cw(c90.26,33.348) 93.8,33.348 93.8,27.46 cw(c91.26,27.46) 91.26,24.92 P6.14
E2_SPI0_SOUT: P6.3 U4.54 | length 51.9
  Top Layer w0.254: U4.54 55.792,54.024 cw(c59.355,50.46) 59.355,55.5 62.548,55.5 cw(c62.548,50.46) 66.112,54.024 81.024,39.112 cw(c77.46,35.548) 82.5,35.548 82.5,27.46 ccw(c85.04,27.46) 85.04,24.92 P6.3
E3_UART2_RTS: P3.12 U4.13 | length 53.7
  Top Layer w0.254: P3.12 18.36,19.84 ccw(c18.36,22.38) 20.9,22.38 20.9,32.2 cw(c23.004,32.2) 21.516,33.688 30.317,42.488 ccw(c27.46,45.345) 31.5,45.345 31.5,47.348 cw(c35.54,47.348) 32.683,50.205 35.995,53.517 cw(c38.852,50.66) 38.852,54.7 40.6,54.7 cw(c40.6,51.035) 43.191,53.627 U4.13
E4_CAN0_RX: P3.3 U1.4 U4.6 | length 206.5
  Top Layer w0.254: P3.3 9.54,24.92 cw(c9.54,27.46) 7,27.46 7,32.948 cw(c10.54,32.948) 8.037,35.451 8.293,35.707 cw(c10.69,33.31) 10.69,36.7 15.748,36.7 ccw(c15.748,41.74) 19.312,38.176 23.524,42.388 ccw(c19.96,45.952) 25,45.952 25,46.548 cw(c28.54,46.548) 26.037,49.051 34.549,57.563 cw(c37.052,55.06) 37.052,58.6 41.702,58.6 cw(c41.702,55.06) 44.205,57.563 U4.6 ; v1(55.2,64.8) 56.555,64.8 73.85,82.095 U1.4
  Bottom Layer w0.254: P3.3 9,21.42 9,10 12.2,6.8 20.4,6.8 27.2,13.6 27.2,57.8 34.2,64.8 v1(55.2,64.8)
E5_CAN0_TX: P3.4 U1.1 U4.5 | length 204.9
  Top Layer w0.254: P3.4 9.04,22.38 cw(c9.04,24.92) 6.5,24.92 6.5,32.948 cw(c10.54,32.948) 7.683,35.805 7.939,36.061 cw(c10.69,33.31) 10.69,37.2 15.748,37.2 ccw(c15.748,41.74) 18.958,38.53 23.17,42.742 ccw(c19.96,45.952) 24.5,45.952 24.5,46.548 cw(c28.54,46.548) 25.683,49.405 34.195,57.917 cw(c37.052,55.06) 37.052,59.1 41.702,59.1 cw(c41.702,55.06) 44.558,57.917 U4.5 ; v1(55.4,66.2) 55.4,67.455 73.85,85.905 U1.1
  Bottom Layer w0.254: P3.4 10.4,20.28 10.4,11.2 12.2,9.4 20.6,9.4 25.041,13.841 25.041,56.641 34.6,66.2 v1(55.4,66.2)
E6_SPI0_PCS2: P6.4 U4.53 | length 53.7
  Top Layer w0.254: U4.53 56.145,53.67 cw(c59.355,50.46) 59.355,55 62.548,55 cw(c62.548,50.46) 65.758,53.67 80.67,38.758 cw(c77.46,35.548) 82,35.548 82,24.92 ccw(c84.54,24.92) 84.54,22.38 P6.4
E7_ADC2_2: P4.2 U4.39 | length 23
  Top Layer w0.254: U4.39 56.377,42.562 cw(c52.46,38.645) 58,38.645 58,30 ccw(c60.54,30) 60.54,27.46 P4.2
E8: P5.8 U4.17 | length 48
  Top Layer w0.254: P5.8 32.54,12.22 cw(c32.54,14.76) 30,14.76 30,32.8 cw(c36.044,32.8) 31.77,37.073 U4.17
E9_UART2_CTS: P3.9 U4.16 | length 59.3
  Top Layer w0.254: P3.9 19.86,12.22 ccw(c19.86,14.76) 22.4,14.76 22.4,32.2 cw(c23.004,32.2) 22.577,32.627 31.377,41.428 ccw(c27.46,45.345) 33,45.345 33,47.348 cw(c35.54,47.348) 33.744,49.144 37.056,52.456 cw(c38.852,50.66) 38.852,53.2 40.6,53.2 cw(c40.6,51.035) 42.131,52.566 U4.16
E10_ADC2_12: P3.5 U4.4 | length 74.9
  Top Layer w0.254: P3.5 8.54,19.84 cw(c8.54,22.38) 6,22.38 6,32.948 cw(c10.54,32.948) 7.33,36.158 7.586,36.414 cw(c10.69,33.31) 10.69,37.7 15.748,37.7 ccw(c15.748,41.74) 18.605,38.883 22.817,43.095 ccw(c19.96,45.952) 24,45.952 24,46.548 cw(c28.54,46.548) 25.33,49.758 33.842,58.27 cw(c37.052,55.06) 37.052,59.6 41.702,59.6 cw(c41.702,55.06) 44.912,58.27 U4.4
E11_ADC2_13: P3.6 P7.1 U4.3 | length 146.8
  Top Layer w0.254: P3.6 8.04,17.3 cw(c8.04,19.84) 5.5,19.84 5.5,32.948 cw(c10.54,32.948) 6.976,36.512 7.232,36.768 cw(c10.69,33.31) 10.69,38.2 15.748,38.2 ccw(c15.748,41.74) 18.251,39.237 ; 18.251,39.237 22.463,43.449 ccw(c19.96,45.952) 23.5,45.952 23.5,46.548 cw(c28.54,46.548) 24.976,50.112 33.488,58.624 cw(c37.052,55.06) 37.052,60.1 41.702,60.1 cw(c41.702,55.06) 45.265,58.624 U4.3 48.627,55.262 48.627,50.773 v1(49,50.4) ; v1(27.6,61.2) 31.8,61.2 v1(32,61)
  Bottom Layer w0.254: P7.1 13.2,78.76 13.2,63.8 15.2,61.8 18.2,61.8 18.6,61.4 27.4,61.4 v1(27.6,61.2) ; v1(32,61) 32.8,61 43.4,50.4 v1(49,50.4)
FTDI_GREEN: D3.2 U3.23 | length 14.4
  Top Layer w0.254: D3.2 32.5,92.55 34.15,94.2 44,94.2 44.619,94.819 44.619,96.019 U3.23
FTDI_RED: D4.2 U3.22 | length 10.8
  Top Layer w0.254: D4.2 43.35,92.55 45.275,94.475 U3.22
GND: B1.2 B1.4 C1.1 C2.1 C3.1 C4.1 C6.1 C7.1 C8.1 C9.1 C10.1 C11.1 J1.5 P3.15 P4.1 P10.2 P11.3 P11.5 R3.1 R6.1 R8.1 R10.1 R12.3 R14.3 R15.3 U1.2 U2.2 U3.7 U3.18 U3.21 U3.25 U3.26 U4.10 U4.40 | length 48.8
  Bottom Layer w0.254: R15.3 cw(c23.14,75) 23.14,75.6 v2(33,75.6) 34,75.6 39.6,70 ; v2(43.8,67.6) 40,67.6 ccw(c40,67.2) v2(39.6,67.2) 39.6,70 ; v2(46.5,81.3) 46.5,79.534 46,79.034 v2(46,79) 46,76.4 47.4,75 cw(c47.4,74.8) v2(47.6,74.8) 40.4,74.8 40.2,75 v2(38.6,75) 39.6,74 39.6,70
  other v2: 28.2,46 52,51 46.2,51.4 57.4,89
NetC2_2: C2.2 R1.2 R2.1 U1.5 | length 12.4
  Top Layer w0.254: U1.5 79.725,79.075 80.65,78.15 R1.2 ; R1.2@80.8,76.55 R1.2 ; R2.1 83.85,76.4 C2.2 80.7,76.35 R1.2
NetC4_2: C4.2 R4.2 R5.1 U2.5 | length 11.7
  Top Layer w0.254: R4.2 80.725,64.725 C4.2 85.8,64.725 ; v1(85.8,61.2) 86.105,60.895 U2.5 ; v1(85.8,63.6) 85.8,64.725 ; R5.1 86.875,64.725 85.8,64.725
  Bottom Layer w0.254: v1(85.8,61.2) v1(85.8,63.6)
NetC5_1: C5.1 U3.2 | length 5.3
  Top Layer w0.254: C5.1 41.6,85.8 42.025,86.225 U3.2
NetD1_2: D1.2 R7.2 | length 6.2
  Top Layer w0.254: D1.2 7.25,46.15 9.2,44.2 R7.2
NetD2_2: D2.2 R9.2 | length 5.6
  Top Layer w0.254: D2.2 7.25,54.35 8.6,53 R9.2
NetD3_1: D3.1 R16.1 | length 2.4
  Top Layer w0.254: R16.1 32.4,88.1 D3.1
NetD4_1: D4.1 R18.1 | length 2.5
  Top Layer w0.254: R18.1 36.6,90.05 D4.1
NetM1_3: M1.3 R7.1 | length 3.4
  Top Layer w0.254: R7.1 13.8,44.2 14.4,44.8 M1.3
NetM2_3: M2.3 R9.1 | length 3.9
  Top Layer w0.254: R9.1 13,53 14,54 M2.3
NetP7_2: P7.2 R12.2 | length 11.7
  Top Layer w0.254: P7.2 13.8,85 15.2,86.4 18.6,86.4 R12.2
NetP8_2: P8.2 R15.2 | length 11.8
  Top Layer w0.254: P8.2 13.2,75 14.8,76.6 18.4,76.6 R15.2
NetP9_2: P9.2 R14.2 | length 11.7
  Top Layer w0.254: P9.2 13.6,65 15,66.4 18.6,66.4 R14.2
NetR3_2: R3.2 U1.8 | length 3.1
  Top Layer w0.254: U1.8 82.655,85.905 R3.2
NetR6_2: R6.2 U2.8 | length 3.1
  Top Layer w0.254: R6.2 82.135,59.2 82.295,59.36 U2.8
NetR11_1: R11.1 U3.1 | length 5.9
  Top Layer w0.254: R11.1 39.6,85.6 41.375,87.375 U3.1
NetR13_1: R13.1 U3.5 | length 5.5
  Top Layer w0.254: U3.5 43.975,84.425 44.75,83.65 R13.1
PWR_IN: C1.2 C3.2 C7.2 C8.2 C9.2 C10.2 C11.2 D1.1 D2.1 J1.1 P3.1 P3.2 P3.16 P4.16 P10.1 P11.1 R12.1 R14.1 R15.1 R16.2 R17.2 R18.2 R19.2 U1.3 U2.3 U3.4 U3.19 U3.20 U4.7 U4.8 U4.9 U4.41 | length 519.1
  Top Layer w0.254: D1.1 9.55,48.85 4,54.4 4,57.4 6.2,59.6 6.2,60.2 ; D2.1 9.55,57.85 9,58.4 8,58.4 6.2,60.2 ; R14.1 20.46,62 23,62 28.6,67.6 28.6,69.2 ; R15.1 19.46,73 25.8,73 28.6,75.8 ; R12.1 19.66,82.8 28.6,82.8 ; R17.2 31.25,76.85 34.075,79.675 35.675,79.675 ; R19.2 41.4,70.8 41.8,71.2 ; U3.4 43.325,91.125 ; U3.20 46.575,94.625 47.225,93.975 ; U3.19 47.225,93.975 ; v2(49.4,58.4) 49.4,60.125 C10.2 C8.2 49.325,63.675 41.8,71.2 ; v2(50,49.2) 49.879,49.2 49.565,48.885 49.315,48.885 ; v2(58.4,50.6) 59.75,50.6 C9.2 ; J1.1 60.8,92.369 ; P4.16 66.3,30 ccw(c66.3,32) 68.3,32 68.3,36.8 ccw(c67.8,36.8) 68.154,37.154 66.097,39.21 ccw(c63.948,37.06) 63.948,40.1 62.755,40.1 cw(c62.755,46.14) 58.485,41.869 U4.41 54.21,46.111 53.653,46.668 51.532,46.668 49.315,48.885 ; U1.3 75.381,83.365 ; C1.2 75.475,80.275 76,80.8 76,82.746 75.381,83.365 ; P10.1 82.39,92.8 81.59,92 80.8,92 ; v1(84.835,51.94) U2.3 84.901,54.141 84.901,55.051 85.05,55.2 87,55.2 87.35,54.85 C3.2 ; 6.2,60.2 6.2,66.4 9,69.2 28.6,69.2 ; P3.1 9.6,30 cw(c9.6,31.6) 8,31.6 8,32.948 cw(c10.54,32.948) 8.744,34.744 9,35 cw(c10.69,33.31) 10.69,35.7 15.748,35.7 ccw(c15.748,41.74) 20.019,37.469 24.231,41.681 ccw(c19.96,45.952) 26,45.952 26,46.548 cw(c28.54,46.548) 26.744,48.344 35.256,56.856 cw(c37.052,55.06) 37.052,57.6 41.701,57.6 cw(c41.701,55.06) 43.498,56.856 U4.8 48.17,52.184 ; P3.1 P3.16 16.7,30 ccw(c16.7,32.2) 18.9,32.2 cw(c23.004,32.2) 20.102,35.102 28.756,43.756 ccw(c26.96,45.552) 29.5,45.552 29.5,47.555 cw(c35.04,47.555) 31.123,51.472 34.728,55.077 cw(c38.645,51.16) 38.645,56.7 40.652,56.7 cw(c40.652,51.16) 44.569,55.077 U4.9 48.17,51.477 ; P3.1 P3.2 10.04,27.46 cw(c10.04,30) 7.5,30 7.5,32.948 cw(c10.54,32.948) 8.39,35.097 8.646,35.354 cw(c10.69,33.31) 10.69,36.2 15.748,36.2 ccw(c15.748,41.74) 19.665,37.823 23.877,42.035 ccw(c19.96,45.952) 25.5,45.952 25.5,46.548 cw(c28.54,46.548) 26.39,48.697 34.903,57.21 cw(c37.052,55.06) 37.052,58.1 41.701,58.1 cw(c41.701,55.06) 43.851,57.21 U4.7 48.17,52.891 48.17,52.184 ; 28.6,69.2 28.6,75.8 ; 28.6,75.8 28.6,82.8 ; 28.6,82.8 31.4,85.6 31.4,85.85 32.15,86.6 R16.2 36.55,86.6 R18.2 ; 35.675,79.675 36.6,80.6 R18.2 ; 35.675,79.675 C11.2 35.675,75.725 36.34,75.06 P11.1 39.8,73.2 41.8,71.2 ; R18.2 37.95,86.55 39.2,87.8 39.2,90 40.325,91.125 43.325,91.125 ; 43.325,91.125 44.463,92.263 46.663,92.263 47.8,93.4 ; 47.225,93.975 47.8,93.4 ; 47.8,93.4 48.2,93 50.4,93 52.6,90.8 C7.2 52.675,89.4 53.4,89.4 53.8,89 53.8,87.2 54.6,86.4 57.4,86.4 60.8,89.8 60.8,92.369 ; 48.17,51.477 48.17,52.184 ; 48.17,51.477 48.17,50.03 49.315,48.885 ; 60.8,92.369 61.169,92 80.8,92 ; 75.381,83.365 76.4,84.384 76.4,87.6 80.8,92
  Bottom Layer w0.254: v2(49.4,58.4) 51.28,56.52 51.28,52.08 50,50.8 v2(50,49.2) 57,49.2 v2(58.4,50.6) 59.6,49.4 82.295,49.4 v1(84.835,51.94)
VCC_3V3: C6.2 U3.17 | length 10.8
  Top Layer w0.254: U3.17 48.525,94.475 49.2,93.8 51.8,93.8 55,90.6 C6.2
pads on no net: J1.4 J1.6 J1.7 J1.8 J1.9 J1.10 J1.11 M1.2 M2.2 P11.7 P11.9 P11.MH1 P11.MH2 U3.6 U3.8 U3.9 U3.10 U3.12 U3.13 U3.14 U3.24 U3.27 U3.28

## Polygon pours and split planes (outlines as drawn)
GND on Top Layer "Top Layer-GND" (solid, remove dead copper, pour order 4): 0,99 -0.274,0.274 0,0 99,0 99,99
no net on Top Layer (solid, pour order 18): 114.8,43
no net on Top Layer (solid, pour order 16): 53.6,28.4
GND on Bottom Layer "Bottom Layer-GND" (solid, remove dead copper, pour order 14): 0,99 -0.275,0 99,0 99,99

## Keep-outs
Keep-Out Layer:
  lines w1.2: 99,99 99,0 0,0 0,99 99,99 ; 99,99 99,99

## Other copper
Top Layer:
  pour cut-out: 34.8,82.6
  pour cut-out: 65.7,80.2
  pour cut-out: 65.1,80.2
  pour cut-out: 65.5,80.2
Bottom Layer:
  pour cut-out: 24.564,64.6 ccw(c34.564,74.6) 44.564,64.6 ccw(c34.564,74.6)
  pour cut-out: 54.564,64.6 ccw(c64.564,74.6) 74.564,64.6 ccw(c64.564,74.6)
  pour cut-out: 4.564,74.6 ccw(c9.564,79.6) 14.564,74.6 ccw(c9.564,79.6)
  pour cut-out: 84.564,74.6 ccw(c89.564,79.6) 94.564,74.6 ccw(c89.564,79.6)

## Silkscreen, mask and mechanical layers (free items; w line width, h text height)
Top Overlay:
  text "PWR" at 78.6,88.6 h1.52
  text "GND" at 85.2,88.6 h1.52
  text "E11_ADC2" at 13.8,88 h1.52
  text "D4_ADC1" at 13.9,78.1 h1.52
  text "C15_ADC0" at 14,68.2 h1.52
  text "RESET" at 48.2,67.8 h1.52
  text "DEV BOARD / - AUSTIN CONRAD / - PATRICK REEDY" at 73.6,55 h1.5 r90
  text "a" at 80.3,53.1 h20 r90.25
  text "VCC" at 6.8,29.6 h1
  text "A2" at 68.04,29.6 h1
  text "A11" at 92.98,29.6 h1
  text "C1" at 42.9,29.54 h1
  text "VSS" at 56.74,29.42 h1
  text "A12" at 81.6,29.4 h1
  text "VCC" at 18.02,29.34 h1
  text "D5" at 32.46,29.34 h1
  text "A3" at 68.04,27.06 h1
  text "A10" at 92.98,27.06 h1
  text "VCC" at 6.8,27 h1
  text "C0" at 42.9,27 h1
  text "E7" at 57.74,26.96 h1
  text "A13" at 81.6,26.86 h1
  text "GND" at 18.02,26.8 h1
  text "D6" at 32.46,26.8 h1
  text "E4" at 7.8,24.6 h1
  text "D2" at 68.04,24.52 h1
  text "E1" at 92.98,24.52 h1
  text "C17" at 42.9,24.46 h1
  text "E2" at 81.6,24.32 h1
  text "A6" at 57.74,24.3 h1
  text "B7" at 18.02,24.26 h1
  text "D7" at 32.46,24.26 h1
  text "E5" at 7.8,22 h1
  text "D3" at 68.04,21.98 h1
  text "E0" at 92.98,21.98 h1
  text "C16" at 42.9,21.92 h1
  text "A7" at 57.8,21.8 h1
  text "E6" at 81.6,21.78 h1
  text "B6" at 18.02,21.72 h1
  text "C2" at 32.46,21.72 h1
  text "D4" at 68.04,19.44 h1
  text "C5" at 92.98,19.44 h1
  text "E10" at 7,19.4 h1
  text "C15" at 42.9,19.38 h1
  text "C6" at 81.6,19.24 h1
  text "E3" at 18.02,19.18 h1
  text "C3" at 32.46,19.18 h1
  text "C8" at 57.74,19.18 h1
  text "B12" at 68.04,16.9 h1
  text "C4" at 92.98,16.9 h1
  text "C14" at 42.9,16.84 h1
  text "E11" at 7.2,16.8 h1
  text "C9" at 57.74,16.72 h1
  text "C7" at 81.6,16.7 h1
  text "D16" at 18.02,16.64 h1
  text "B4" at 32.46,16.64 h1
  text "B13" at 68.04,14.36 h1
  text "A5" at 92.98,14.36 h1
  text "B3" at 42.9,14.3 h1
  text "A0" at 81.6,14.16 h1
  text "D15" at 18.02,14.1 h1
  text "B5" at 32.46,14.1 h1
  text "B0" at 57.74,14.06 h1
  text "D0" at 7.6,14 h1
  text "VDD" at 68.04,11.82 h1
  text "A4" at 92.98,11.82 h1
  text "B2" at 42.9,11.76 h1
  text "A1" at 81.6,11.62 h1
  text "B1" at 57.94,11.6 h1
  text "E9" at 18.02,11.56 h1
  text "E8" at 32.46,11.56 h1
  text "VDDA" at 5.6,11.4 h1

## Text inside footprints (layer, text, board x,y; h text height)
D1: Top Overlay "*" at 6.876,46.892 h1.52 r180
D2: Top Overlay "*" at 6.876,55.892 h1.52 r180
D3: Top Overlay "*" at 31.892,92.924 h1.52 r90
D4: Top Overlay "*" at 36.292,92.924 h1.52 r90